# Altium PCB PT2262.PcbDoc
Units mil, origin at the board's own origin, x right, y up, seen from the top; angles counter-clockwise.
Board outline 6000 x 4000 mil, 2 copper layers (Top Layer, Bottom Layer); 19 components, 13 nets, 63 pads, 0 vias.
Unrouted connection lines stored in the file: 4.
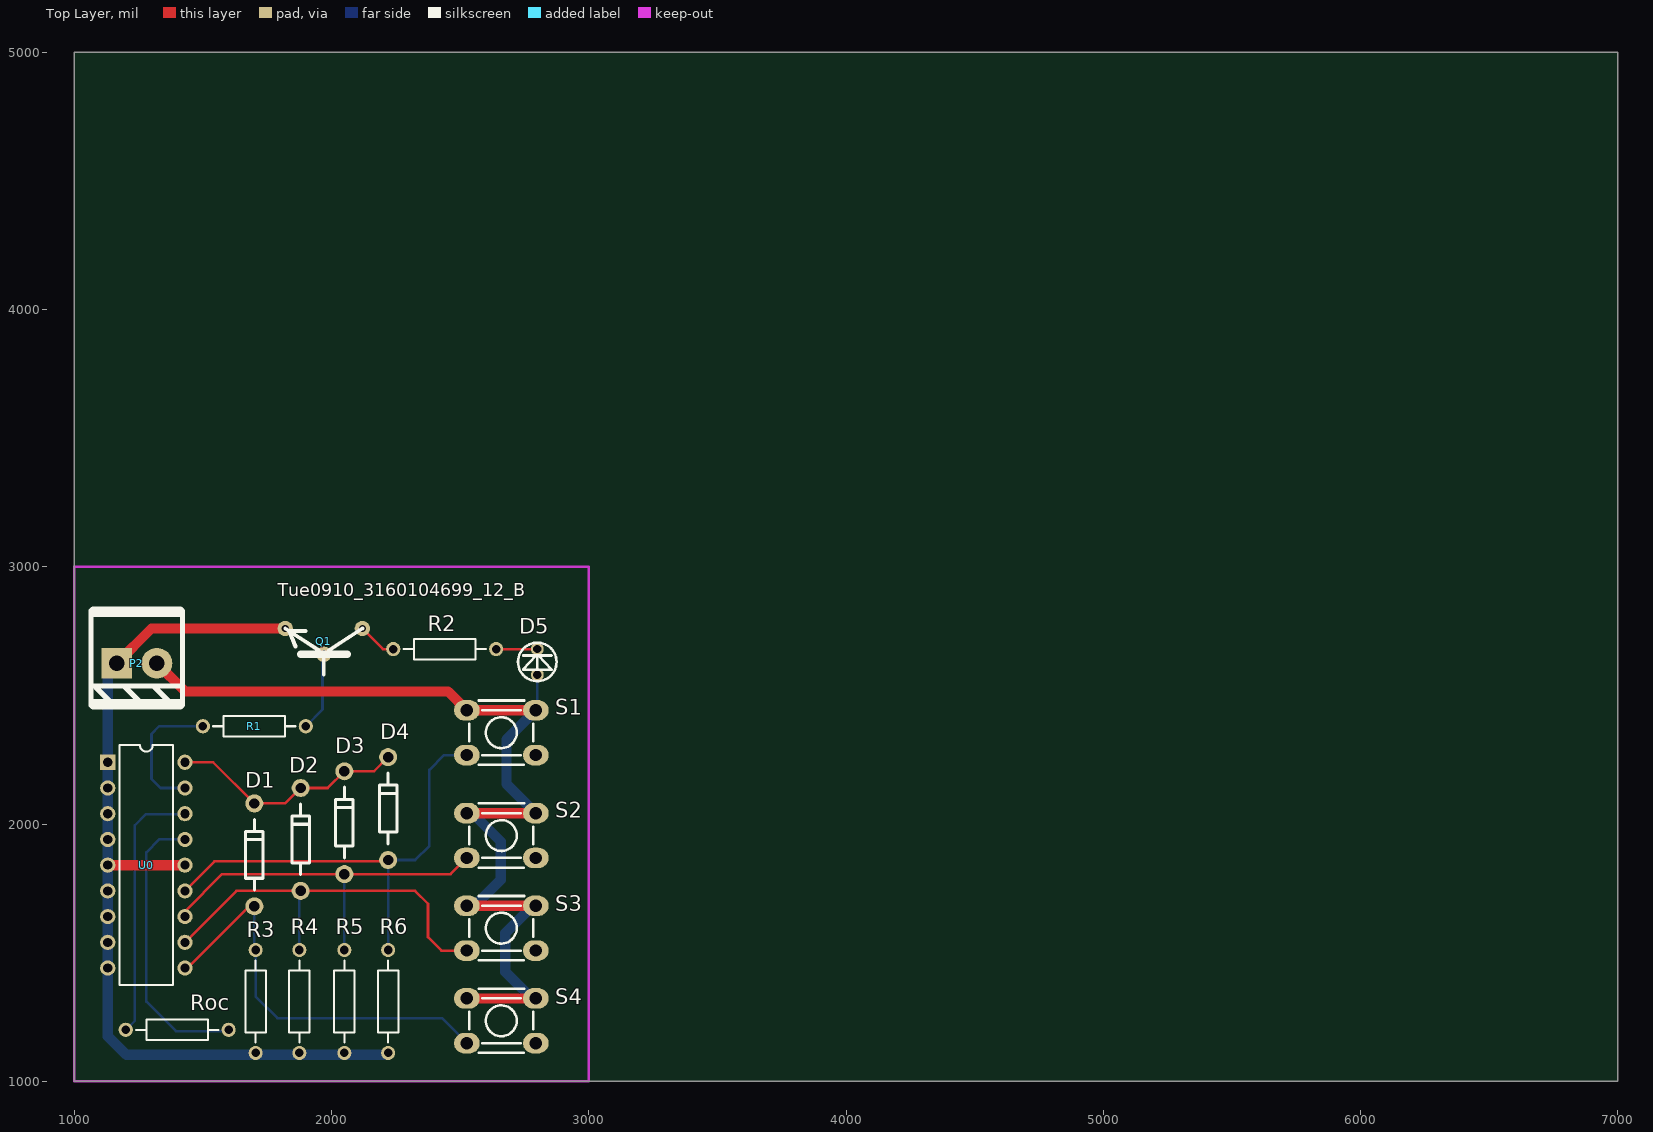
[diagram p0: Top Layer view]
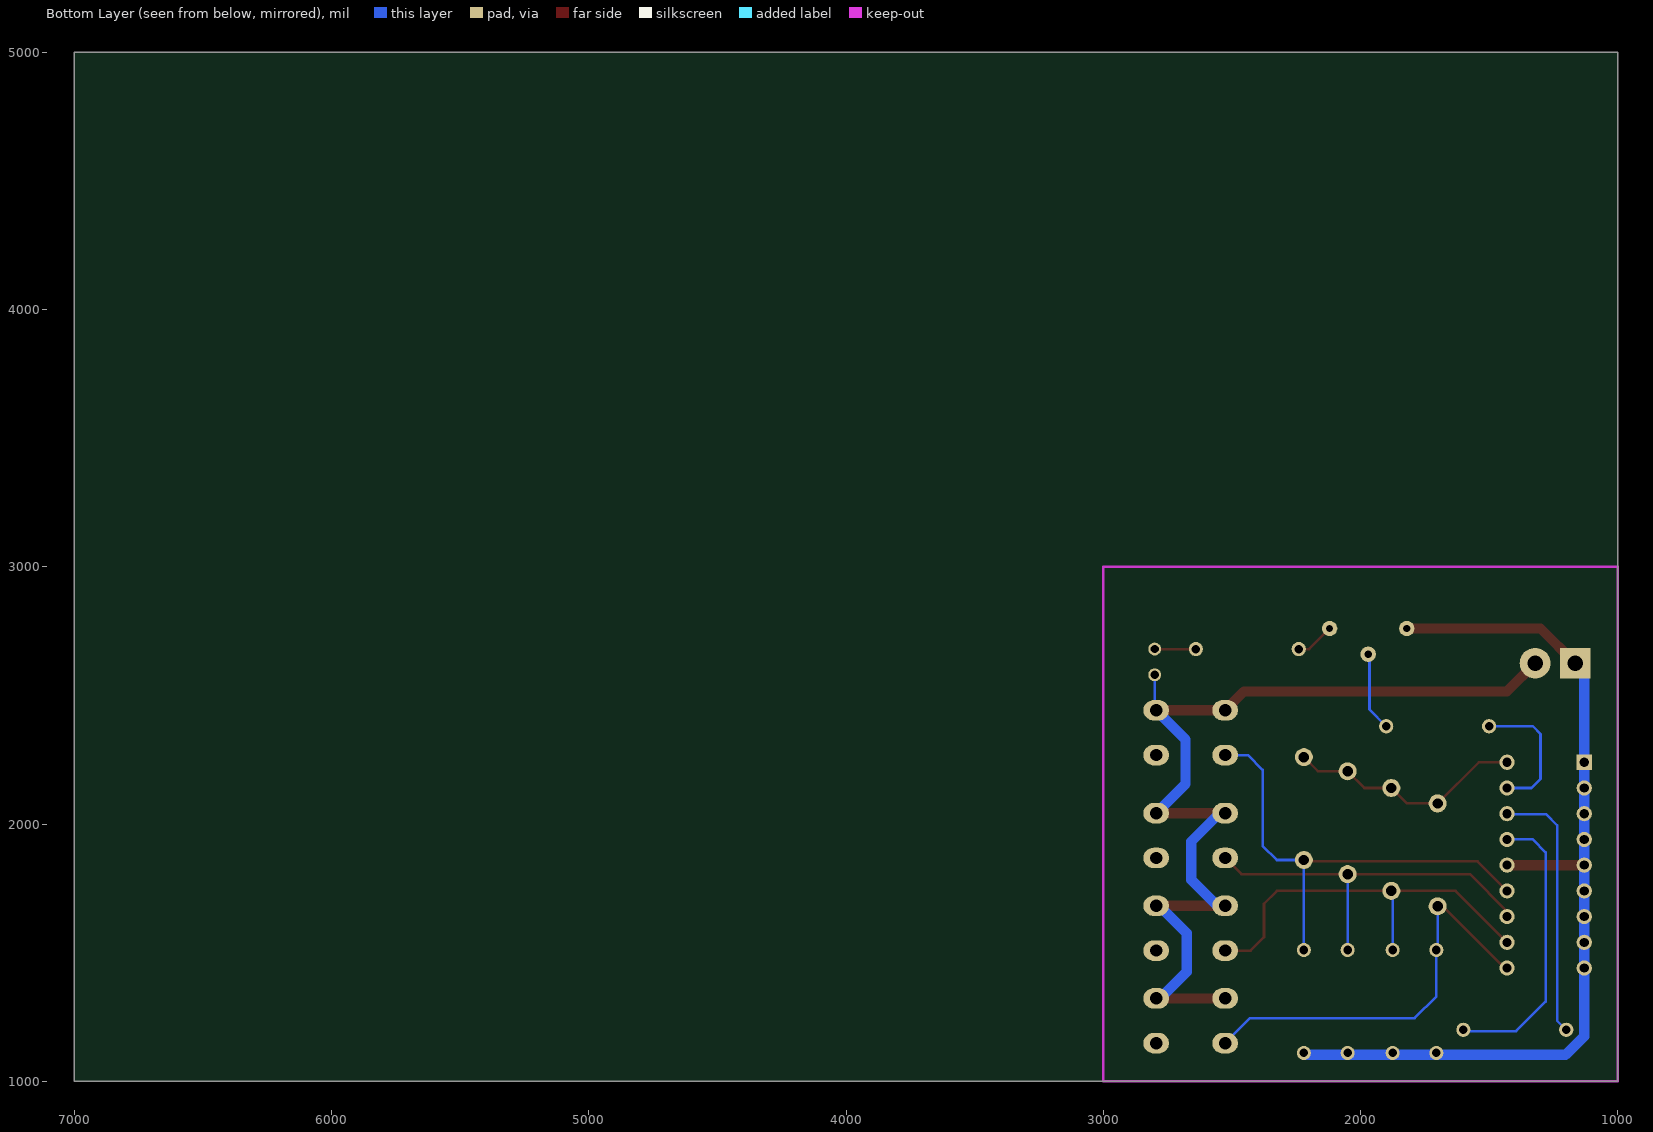
[diagram p1: Bottom Layer view, seen from below]

## Layer stack, top to bottom
Top Layer: signal copper 1.4
Dielectric: dielectric 12.6, FR-4, Dk 4.8
Bottom Layer: signal copper 1.4

## Board outline
1000,1000 7000,1000 7000,5000 1000,5000

## Design rules (kind name [scope] priority, off if disabled: settings)
Clearance [All] p1: gap=10
PolygonConnect [All] p1: connectstyle=Relief reliefconductorwidth=10 reliefentries=4 polygonreliefangle="90 Angle"
RoutingVias [All] p1: holewidth=28 width=50 viastyle="Through Hole" minholewidth=28 minwidth=50 maxholewidth=28 maxwidth=50
SilkscreenOverComponentPads [All] p1: minsilkscreentomaskgap=10
SolderMaskExpansion [All] p1: expansion=4
TestPointUsage [All] p1: valid=0 allowmultiple=FALSE
Testpoint [All] p1: side=15 testpointundercomponent=TRUE minsize=40 maxsize=100 preferedsize=60 minholesize=0 maxholesize=40 preferedholesize=32 testpointgrid=1 style=1023 order=0123456789
Width [All] p1: maxlimit=100 minlimit=10 preferedwidth=10
23 further rules are at their usual default settings.

## Components (designator, comment, footprint, x,y, rotation, side; value= is the part's Value field where it differs from the comment)
D1 "Diode" DIODE4 1700,1680 r90 top
D2 "Diode" DIODE4 1880,1740 r90 top
D3 "Diode" DIODE4 2050,1805 r90 top
D4 "Diode" DIODE4 2220,1860 r90 top
D5 "" LEDLXH-3 2800,2580 r180 top
P2 "Header 2" "POWER PLUG2" 1165,2625 r180 top
Q1 "S8050" NPN-2 1820,2760 r90 top
R1 "Res2" AXIAL-0.4 1700,2380 r180 top
R2 "Res2" AXIAL-0.4 2440,2680 r0 top
R3 "Res2" AXIAL-0.4 1705,1310 r90 top
R4 "Res2" AXIAL-0.4 1875,1310 r90 top
R5 "Res2" AXIAL-0.4 2050,1310 r90 top
R6 "10Kx4" AXIAL-0.4 2220,1310 r90 top
Roc "Res2" AXIAL-0.4 1400,1200 r0 top
S1 "SW-PB" AN-S 2660,2355 r180 top
S2 "SW-PB" AN-S 2660,1955 r180 top
S3 "SW-PB" AN-S 2660,1595 r180 top
S4 "SW-PB" AN-S 2660,1235 r180 top
U0 "PT2262" DIP-18 1280,1840 r270 top

## Footprints (in the part's own frame and the unit in brackets; to place one, negate y for a bottom-side part, rotate by r counter-clockwise, add the part's x,y. Pads: shape width x height; smd on the part's side, far side on the other; paste and mask are expansions set on the pad)
AN-S [mil]
  oval 100x80 hole 48: 1(-134,87) 1(134,87) 2(-134,-87) 2(134,-87)
  silkscreen extent -125,-125 125,125
AXIAL-0.4 [mm] "Resistor; 2 Leads"
  round 1.4 hole 0.85: 1(-5.08,0) 2(5.08,0)
  silkscreen extent -4.06,-1.02 4.06,1.02
DIODE4 [mil]
  round 70 hole 40: 1(0,0) 2(400,0)
  silkscreen extent 63,-34 338,34
DIP-18 [mm] "DIP; 18 Leads; Row Spacing 7.62 mm; Pitch 2.54 mm"
  rect 1.5x1.5 hole 0.9: 1(-10.16,-3.81)
  round 1.5 hole 0.9: 2(-7.62,-3.81) 3(-5.08,-3.81) 4(-2.54,-3.81) 5(0,-3.81) 6(2.54,-3.81) 7(5.08,-3.81) 8(7.62,-3.81) 9(10.16,-3.81) 10(10.16,3.81) 11(7.62,3.81) 12(5.08,3.81) 13(2.54,3.81) 14(0,3.81) 15(-2.54,3.81) 16(-5.08,3.81) 17(-7.62,3.81) 18(-10.16,3.81)
  silkscreen extent -11.85,-2.65 11.85,2.65
LEDLXH-3 [mil]
  round 50 hole 32: 1(0,0) 2(0,-100)
  silkscreen extent -75,-125 75,25
NPN-2 [mil]
  round 60 hole 28: 1(0,0) 2(-100,-150) 3(0,-300)
  silkscreen extent -180,-300 0,0
"POWER PLUG2" [mil]
  rect 120x120 hole 60: 1(0,0)
  round 120 hole 60: 2(-156,0)
  silkscreen extent -255,-204 100,164

## Part data
D1 D2 D3 D4: "Default Diode"
D5: library part LED0, "Typical INFRARED GaAs LED"
P2: "Header, 2-Pin"
Q1: library part 2N3904, "NPN General Purpose Amplifier"
R1 R2 R3 R4 R5 Roc: "Resistor"
R6: library part Res2, "Resistor"
S1 S2 S3 S4: "Switch"

## Nets (pads, with @x,y where several pads share a name; then routed paths per layer and width w, separated by ;. In a path a pad name is that pad's centre, name@x,y a point inside that pad or via, vN(x,y) a via of type N, cw(c..) or ccw(c..) an arc to the next point about the centre after c; other vN are vias at no path point)
GND: P2.1 Q1.1 R3.1 R4.1 R5.1 R6.1 U0.1 U0.2 U0.3 U0.4 U0.5 U0.6 U0.7 U0.8 U0.9 U0.14 | length 3603.6
  Top Layer w40: U0.5 U0.14 ; P2.1 1300,2760 Q1.1
  Bottom Layer w40: P2.1@1165,2620 P2.1 1130,2590 U0.9 1130,1175 1202.56,1102.44 2212.44,1102.44 R6.1
NetD1_1: D1.1 R3.2 S4.1 U0.10 | length 1638.5
  Top Layer w10: U0.10 1440,1440 1680,1680 D1.1 ; R3.2@1695,1520 R3.2 ; S4.1@2521.44,1152.56 S4.1@2526,1148
  Bottom Layer w10: D1.1 1700,1515 R3.2 1705,1330 1790,1245 2429,1245 S4.1@2526,1148
NetD1_2: D1.2 D2.2 D3.2 D4.2 U0.18 | length 930.8
  Top Layer w10: U0.18 1540,2240 D1.2 1820,2080 D2.2 1985,2140 D3.2 2165,2205 D4.2
NetD2_1: D2.1 R4.2 S3.1 U0.11 | length 1583.2
  Top Layer w10: U0.11 1630,1740 D2.1 2325,1740 2375,1690 2375,1560 2427,1508 S3.1@2526,1508
  Bottom Layer w10: R4.2 1875,1735 D2.1
NetD3_1: D3.1 R5.2 S2.1 U0.12 | length 1497.2
  Top Layer w10: U0.12 1430,1660 1575,1805 D3.1 2463,1805 S2.1@2526,1868
  Bottom Layer w10: R5.2 D3.1
NetD4_1: D4.1 R6.2 S1.1 U0.13 | length 1780.4
  Top Layer w10: U0.13 1545,1855 D4.1@2200,1855
  Bottom Layer w10: R6.2 2220,1825 ; D4.1 2325,1860 2380,1915 2380,2210 2438,2268 S1.1@2526,2268
NetD5_2: D5.2 R2.2 | length 160
  Top Layer w10: R2.2 D5.2
NetQ1_2: Q1.2 R1.1 | length 309
  Bottom Layer w10: R1.1 1965,2445 1965,2655 Q1.2
NetQ1_3: Q1.3 R2.1 | length 153.1
  Top Layer w10: Q1.3 2200,2680 R2.1
NetR1_2: R1.2 U0.17 | length 516.9
  Bottom Layer w10: U0.17@1415,2140 1335,2140 1300,2175 1300,2350 1330,2380 R1.2
NetRoc_1: Roc.1 U0.16 | length 1023.1
  Bottom Layer w10: Roc.1 1235,1235 1235,1995 1277.5,2037.5 1427.5,2037.5 U0.16
NetRoc_2: Roc.2 U0.15 | length 1118.3
  Bottom Layer w10: U0.15 1330,1940 1280,1890 1280,1835 1280,1310 1395,1195 Roc.2@1600,1195
VCC: D5.1 P2.2 S1.2 S2.2 S3.2 S4.2 | length 3963.1
  Top Layer w40: P2.2 1431,2515 2453,2515 2526,2442 S1.2@2794,2442 ; S4.2@2526,1322 S4.2@2794,1322 ; S3.2@2526,1682 S3.2@2794,1682 ; S2.2@2526,2042 S2.2@2794,2042
  Bottom Layer w10: S1.2@2794,2442 2800,2448 D5.1
  Bottom Layer w40: S3.2@2526,1682 2557,1682 2658,1783 2658,1932 2548,2042 S2.2@2526,2042 ; S4.2@2794,1322 2778,1322 2675,1425 2675,1575 2782,1682 S3.2@2794,1682 ; S2.2@2794,2042 2680,2156 2680,2328 S1.2@2794,2442

## Keep-outs
Keep-Out Layer:
  lines w10: 1000,1000 1000,3000 3000,3000 3000,1000 1000,1000

## Silkscreen, mask and mechanical layers (free items; w line width, h text height)
Top Overlay:
  text "Tue0910_3160104699_12_B" at 1790,2885 h50